# EAGLE board nar12b.v0.2 (EAGLE 6.1)
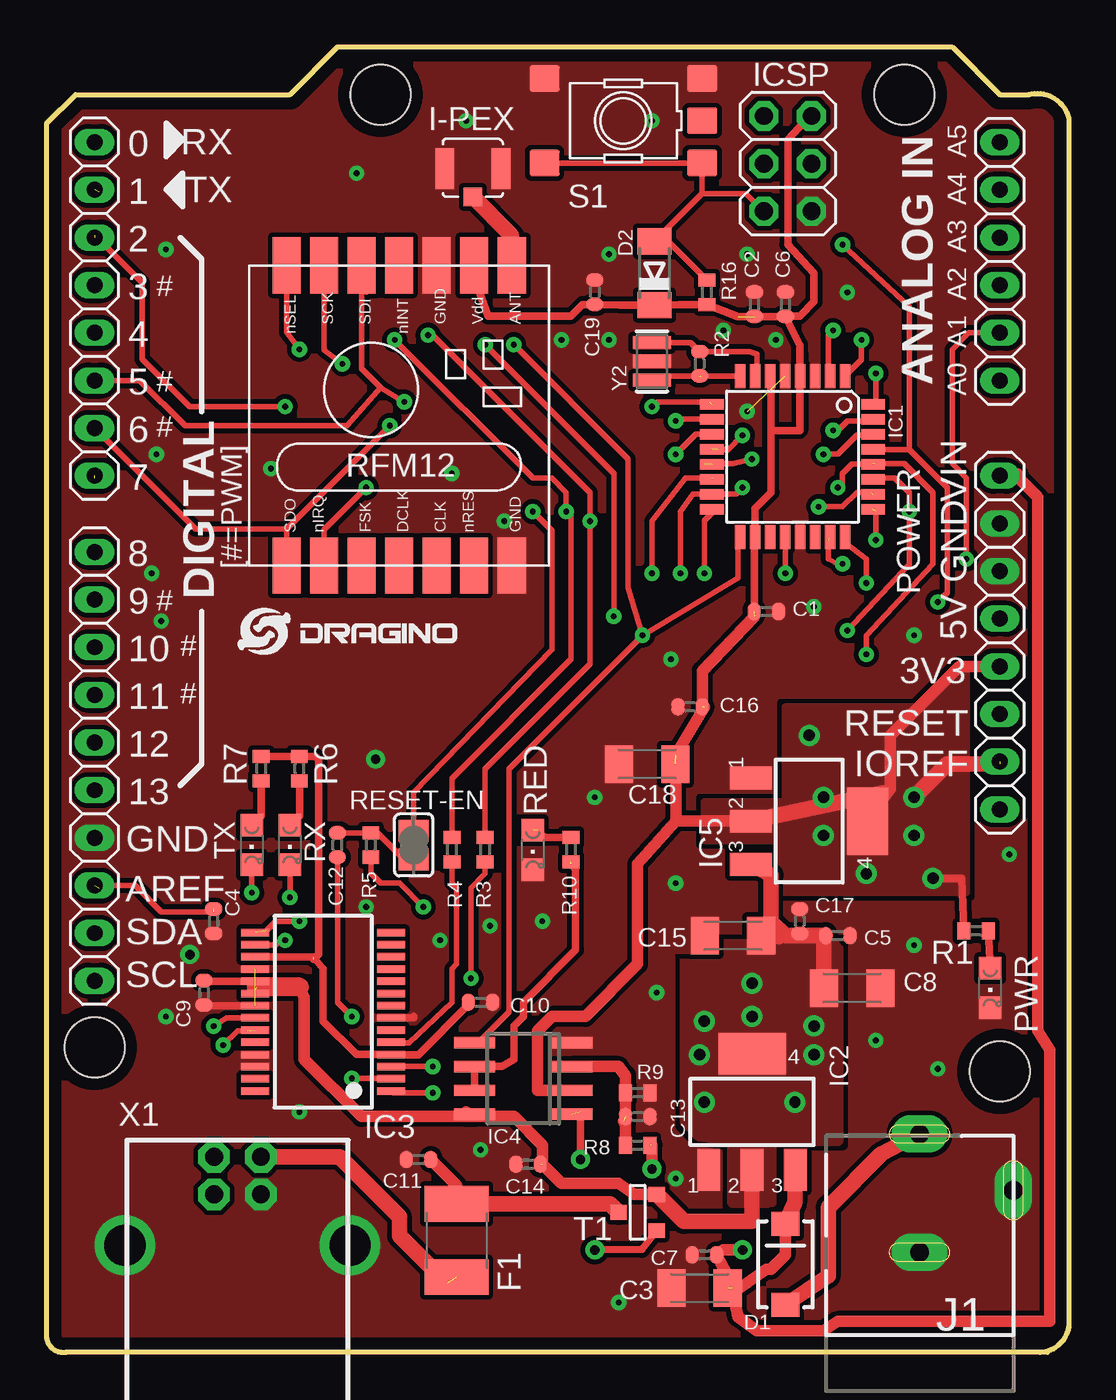
[diagram p0: board, top side]
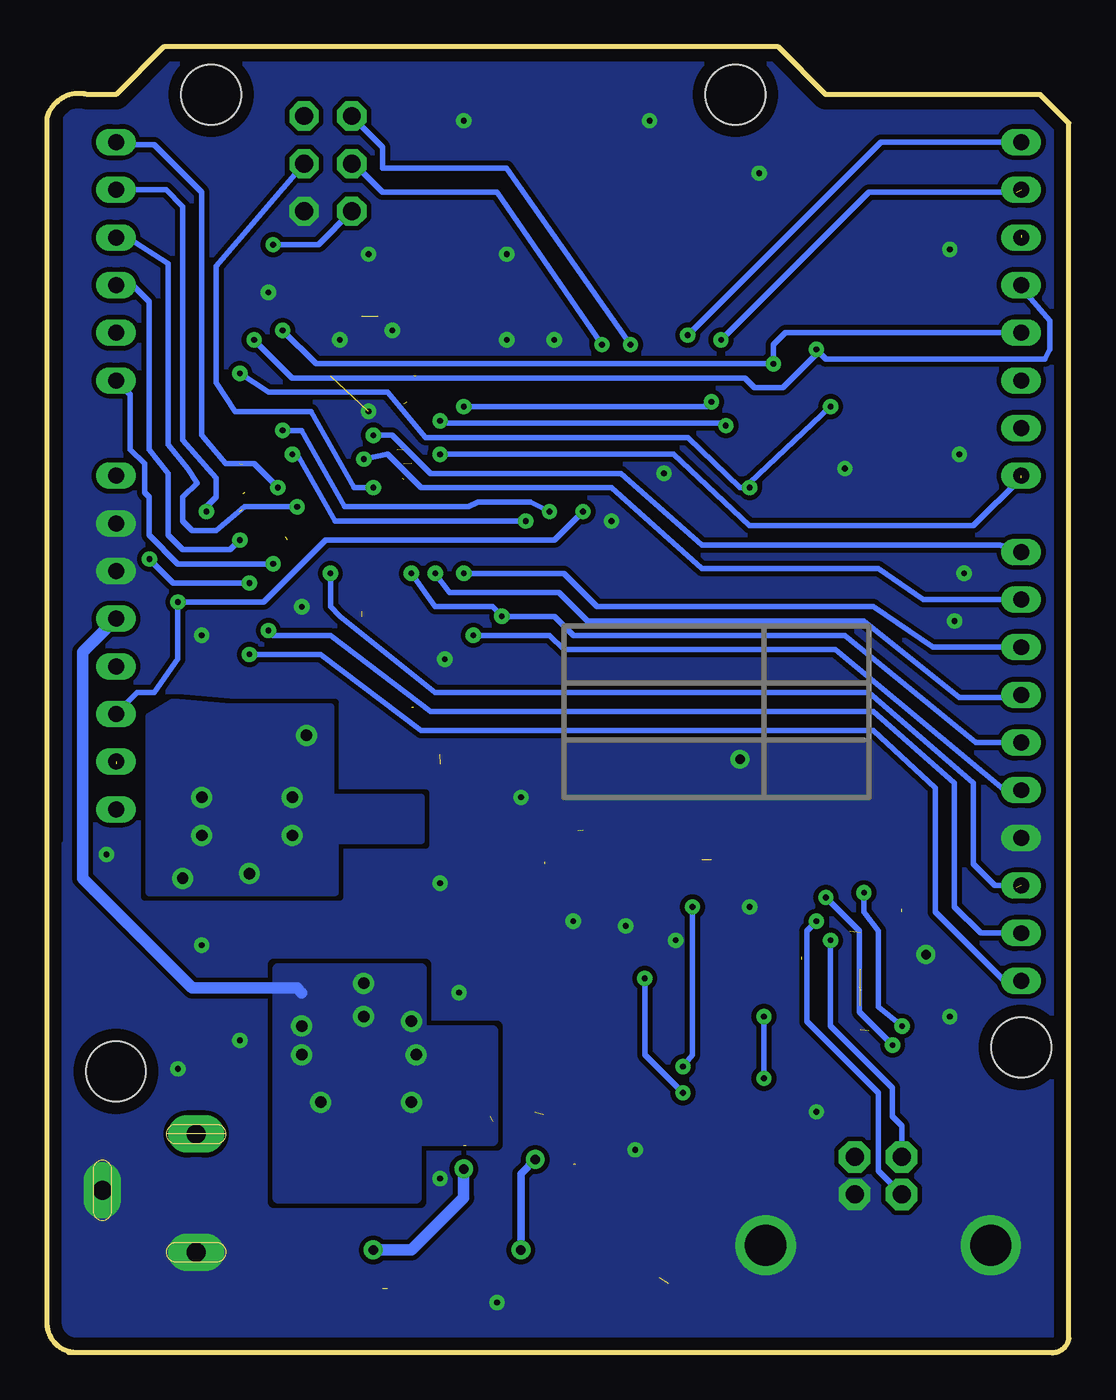
[diagram p1: board, bottom side, seen from below]

Size 54.48 x 69.6 mm. Coordinates in mm from the lower left corner, seen from the top.
Outline: 52.96,0.01 arc90 54.48,1.66 54.48,65.81 arc90 52.34,67.06 50.8,67.06 48.26,69.6 15.49,69.6 12.95,67.06 1.52,67.06 0,65.54 0,0.75 arc90 1,0.01
Outline: 53.34,0.01 52.96,0.01
Outline: 52.96,0.01 1.02,0.01
Copper layers (1*16): Top 0.035mm / dielectric 1.5mm / Bottom 0.035mm
Design rules: minimum track width 5mil, minimum drill 10mil, track to track 8mil, track to pad 8mil, pad to pad 8mil, via to via 10mil, smd to smd 8mil, copper to edge 26mil, drill to drill 10mil, minimum pad ring 10mil, minimum via ring 10mil, stop-mask expansion 1mil, vias tented up to drill 30mil, thermal gap 10mil
Net classes: 0 default: width 0.254 mm, clearance 0.254 mm; 1 power: width 0.61 mm, drill 0.406 mm, clearance 0.254 mm; 2 gnd: width 0.305 mm, drill 0.305 mm, clearance 0.254 mm; 3 usbvcc: width 0.508 mm, drill 0.61 mm, clearance 0.254 mm; 4 aref: width 0.406 mm, drill 0.61 mm, clearance 0.254 mm
Holes 3.2 mm at 17.78,67.06 45.72,67.06 2.54,16.26 50.8,14.99
vRestrict: area 3.9,23.9 to 9,25.7; area 4.2,26.4 to 7.9,28.1; area 4.6,29.5 to 8,30.6; area 4.6,32 to 8,33.2; area 4.6,34.6 to 8,35.7; area 4.6,37.1 to 8,38.2; area 4.6,39.8 to 6.1,40.9; area 6.5,41.3 to 8.3,48.6; area 6.6,61.3 to 9.1,62.7; area 6.6,63.9 to 9.1,65.3; area 4.4,45.9 to 5.8,47.1; area 4.4,48.6 to 6,49.8; 5 more areas

## Footprints (pad centres in the part's own frame; a part is rotated, then mirrored left to right if it is on the bottom)
1X06 = drill 0.85 pad 1.422 long: 1 -6.35,0; 2 -3.81,0; 3 -1.27,0; 4 1.27,0; 5 3.81,0; 6 6.35,0
C0402 = smd 0.7 x 0.9: 1 -0.65,0; 2 0.65,0
C1206K = smd 1.5 x 2: 1 -1.5,0; 2 1.5,0
SMA-DIODE = smd 1.27 x 1.47: A -2.15,0; C 2.15,0
MINIMELF = smd 1.4 x 1.8: A 1.7,0; C -1.7,0
L1812 = smd 1.9 x 3.4: 1 -1.95,0; 2 1.95,0
I-PEX = smd 1 x 2.2: GND -1.65,-0.27; GND1 1.35,-0.27 | smd 1 x 1: SIG -0.15,-1.77
SMARTPRJ_TQFP32-08 = smd 1.27 x 0.559: 1 -4.293,2.8; 2 -4.293,2; 3 -4.293,1.2; 4 -4.293,0.4; 5 -4.293,-0.4; 6 -4.293,-1.2; 7 -4.293,-2; 8 -4.293,-2.8; 17 4.293,-2.8; 18 4.293,-2; 19 4.293,-1.2; 20 4.293,-0.4; 21 4.293,0.4; 22 4.293,1.2; 23 4.293,2; 24 4.293,2.8 | smd 0.559 x 1.27: 9 -2.8,-4.293; 10 -2,-4.293; 11 -1.2,-4.293; 12 -0.4,-4.293; 13 0.4,-4.293; 14 1.2,-4.293; 15 2,-4.293; 16 2.8,-4.293; 25 2.8,4.293; 26 2,4.293; 27 1.2,4.293; 28 0.4,4.293; 29 -0.4,4.293; 30 -1.2,4.293; 31 -2,4.293; 32 -2.8,4.293
SOT223 = smd 1.219 x 2.235: 1 -2.311,-3.099; 2 0,-3.099; 3 2.311,-3.099 | smd 3.6 x 2.2: 4 0,3.099
SSOP28 = smd 0.4 x 1.5: 1 -4.225,-3.625; 2 -3.575,-3.625; 3 -2.925,-3.625; 4 -2.275,-3.625; 5 -1.625,-3.625; 6 -0.975,-3.625; 7 -0.325,-3.625; 8 0.325,-3.625; 9 0.975,-3.625; 10 1.625,-3.625; 11 2.275,-3.625; 12 2.925,-3.625; 13 3.575,-3.625; 14 4.225,-3.625; 15 4.225,3.625; 16 3.575,3.625; 17 2.925,3.625; 18 2.275,3.625; 19 1.625,3.625; 20 0.975,3.625; 21 0.325,3.625; 22 -0.325,3.625; 23 -0.975,3.625; 24 -1.625,3.625; 25 -2.275,3.625; 26 -2.925,3.625; 27 -3.575,3.625; 28 -4.225,3.625
SO08 = smd 0.6 x 2.2: 1 -1.905,-2.6; 2 -0.635,-2.6; 3 0.635,-2.6; 4 1.905,-2.6; 5 1.905,2.6; 6 0.635,2.6; 7 -0.635,2.6; 8 -1.905,2.6
2X03 = drill 0.95 pad 1.55 octagon: 1 -2.54,-1.27; 2 -2.54,1.27; 3 0,-1.27; 4 0,1.27; 5 2.54,-1.27; 6 2.54,1.27
1X10@1 = drill 0.85 pad 1.422 long: 1 -11.43,0; 2 -8.89,0; 3 -6.35,0; 4 -3.81,0; 5 -1.27,0; 6 1.27,0; 7 3.81,0; 8 6.35,0; 9 8.89,0; 10 11.43,0
1X08 = drill 0.85 pad 1.422 long: 1 -8.89,0; 2 -6.35,0; 3 -3.81,0; 4 -1.27,0; 5 1.27,0; 6 3.81,0; 7 6.35,0; 8 8.89,0
POWER_JACK_SLOT = drill 1 pad 2 long: GND@1 2.58,7.5; GND@2 7.58,10.8; PWR 2.58,13.8
CHIPLED_0805 = smd 1.2 x 1.2: A 0,-1.05; C 0,1.05
R0402 = smd 0.7 x 0.9: 1 -0.65,0; 2 0.65,0
SJ = smd 1.168 x 1.6: 1 -0.762,0; 2 0.762,0
TS42 = smd 1.6 x 1.4: 1 -4.2,2.25; 2 4.2,2.25; 3 -4.2,-2.25; 4 4.2,-2.25; 5 -4.2,0
SOT-23 = smd 0.787 x 0.889: 1 0.025,-1.016; 2 -0.94,1.016; 3 0.991,1.016
RFM12 = smd 1.5 x 3: 1 -5,-10; 2 -3,-10; 3 -1,-10; 4 1,-10; 5 3,-10; 6 5,-10; 7 7,-10; 8 7,6; 9 5,6; 10 3,6; 11 1,6; 12 -1,6; 13 -3,6; 14 -5,6
PN61729 = drill 0.95 pad 1.676 octagon: 1 1.25,4.71; 2 -1.25,4.71; 3 -1.25,2.71; 4 1.25,2.71 | drill 2.2: P$1 -6,0; P$2 6,0
RESONATOR = smd 0.7 x 2: 1 -1,0; 2 0,0; 3 1,0

## Placement (x,y rotation side)
AD  6x1F-H8.5  [1X06]  50.8,58.17 90 top
C1  100n  [C0402]  38.35,39.51 0 top
C2  100n  [C0402]  37.72,55.89 90 top
C3  10uF  [C1206K]  34.8,3.44 180 top
C4  100n  [C0402]  8.89,23 90 top
C5  100n  [C0402]  42.16,22.23 0 top
C6  100n  [C0402]  39.37,55.89 90 top
C7  100n-NL  [C0402]  35.05,5.22 180 top
C8  10uF  [C1206K]  42.93,19.44 0 top
C9  100n  [C0402]  8.38,19.19 270 top
C10  100n  [C0402]  23.11,18.68 180 top
C11  100n  [C0402]  19.81,10.3 180 top
C12  100n  [C0402]  15.49,27.06 270 top
C13  100n  [C0402]  31.5,12.58 0 top
C14  100n  [C0402]  25.65,10.04 180 top
C15  10uF  [C1206K]  36.58,22.23 180 top
C16  100n  [C0402]  34.29,34.43 180 top
C17  100n-NL  [C0402]  40.13,23 90 top
C18  10uF  [C1206K]  32,31.38 180 top
C19  100n  [C0402]  29.21,56.52 270 top
D1  SS14  [SMA-DIODE]  39.37,4.71 90 top
D2  CD1206-S01575  [MINIMELF]  32.39,57.54 90 top
F1  500ma  [L1812]  21.84,5.98 270 top
I-PEX  I-PEX  [I-PEX]  22.86,63.38 0 top
IC1  ATMEGA168-20AU  [SMARTPRJ_TQFP32-08]  39.75,47.76 270 top
IC2  BL1117-50CX  [SOT223]  37.59,12.84 0 top
IC3  FT232RL  [SSOP28]  14.73,18.17 90 top
IC4  LMV358D  [SO08]  25.4,14.61 90 top
IC5  BL1117-33CX  [SOT223]  40.64,28.33 270 top
ICSP  3x2 M  [2X03]  39.5,63.38 270 top
IOH  10x1F-H8.5  [1X10@1]  2.54,31.25 270 top
IOL  8x1F-H8.5  [1X08]  2.54,55.63 270 top
J1  12V_VIN  [POWER_JACK_SLOT]  43.94,-2.15 0 top
POWER  8x1F-H8.5  [1X08]  50.8,37.85 90 top
PWR  [CHIPLED_0805]  50.29,19.44 180 top
R1  10K  [R0402]  49.53,22.49 180 top
R2  1M  [R0402]  34.8,52.71 270 top
R3  1K  [R0402]  23.37,26.81 270 top
R4  1K  [R0402]  21.59,26.81 270 top
R5  100_NL  [R0402]  17.27,27.06 270 top
R6  1K  [R0402]  13.46,31.12 270 top
R7  1K  [R0402]  11.43,31.12 270 top
R8  10K  [R0402]  31.5,11.06 0 top
R9  10K  [R0402]  31.5,13.85 180 top
R10  1K  [R0402]  27.94,26.81 270 top
R16  10K  [R0402]  35.18,56.52 270 top
RED  [CHIPLED_0805]  25.91,26.81 180 top
RESET-EN  [SJ]  19.56,27.06 90 top
RX  [CHIPLED_0805]  12.95,27.06 180 top
S1  [TS42]  30.73,65.67 180 top
T1  FDN340P  [SOT-23]  31.5,7.5 270 top
TX  [CHIPLED_0805]  10.92,27.06 180 top
U$1  LOGO-NEW  [LOGO-SILK-NEW]  10.16,37.22 0 top
U$2  RFM12_SMDSMD  [RFM12]  17.78,51.95 0 top
X1  [PN61729]  10.16,5.72 0 top
Y2  CSTCE16M0V53-R0 16MHZ  [RESONATOR]  32.26,52.84 90 top

## Library data of the parts
AD C1 C2 C4-C7 C9-C14 C16 C17 C19 ICSP IOH IOL POWER R2 Y2 = SmartPrj
C3 C18 = resistor; VOL: 25V
C8 = resistor
C15 = resistor; VOL: 10V
D1 = SparkFun
D2 = diode
F1 I-PEX IC1 IC2 IC5 J1 PWR R1 R3-R10 R16 RED RESET-EN RX S1 TX U$1 U$2 X1 = dragino
IC3 = ftdichip; MPN: FT232RL; OC_FARNELL: 1146032; OC_NEWARK: 91K9918
IC4 = linear
T1 = zetex

## Nets
3.3V: C1.1 C2.1 C6.1 C16.1 C18.1 C19.2 D2.C IC1.4 IC1.6 IC1.18 IC4.2 IC5.2 IC5.4 ICSP.2 POWER.2 POWER.4 R1.2 R16.2 U$2.9
3.3V1: C10.2 IC3.4 IC3.17 R6.1 R7.1
5-GND: S1.5
5V [power]: C5.1 C8.1 C9.1 C14.1 C15.1 C17.1 IC2.2 IC2.4 IC3.19 IC3.20 IC4.8 IC5.3 POWER.5 T1.2
/RST: C12.1 D2.A IC1.29 ICSP.5 POWER.3 R5.1 R16.1 RESET-EN.1 RESET-EN.2 S1.1 S1.2
/SEL: IC1.1 IOL.4 U$2.14
AD0: AD.1 IC1.23
AD1: AD.2 IC1.24
AD2: AD.3 IC1.25
AD3: AD.4 IC1.26
AD4/SDA: AD.5 IC1.27 IOH.9
AD5/SCL: AD.6 IC1.28 IOH.10
AREF: C4.2 IC1.20 IOH.8
AVR_RXD: IC3.1 R3.2
AVR_TXD: IC3.5 R4.2
CMP: C13.1 IC4.3 R8.1 R9.2
GND [gnd]: C1.2 C2.2 C3.2 C4.1 C5.2 C6.2 C7.2 C8.2 C9.2 C10.1 C11.2 C13.2 C14.2 C15.2 C16.2 C17.2 C18.2 C19.1 I-PEX.GND I-PEX.GND1 IC1.3 IC1.5 IC1.21 IC2.1 IC3.7 IC3.18 IC3.21 IC3.25 IC3.26 IC4.4 IC5.1 ICSP.6 IOH.7 J1.GND@1 J1.GND@2 POWER.6 POWER.7 PWR.C R9.1 RED.C S1.3 S1.4 U$2.7 U$2.10 X1.4 X1.P$1 X1.P$2 Y2.2
MISO: IC1.16 ICSP.1 IOH.5
MOSI: IC1.15 ICSP.4 IOH.4
N$2: D1.A J1.PWR
N$3: PWR.A R1.1
N$4: IC3.16 X1.2
N$5: IC3.15 X1.3
N$6: F1.2 X1.1
N$7: IC3.3 R5.2
N$8: IC3.23 RX.C
N$9: C12.2 IC3.2
N$10: IC3.22 TX.C
N$11: R6.2 RX.A
N$12: R7.2 TX.A
N$13: IC4.1 T1.3
N$15: IC4.6 IC4.7 R10.2
N$16: R10.1 RED.A
N$19: I-PEX.SIG U$2.8
PB0: IC1.12 IOH.1
PB1: IC1.13 IOH.2
PD0: IC1.30 IOL.1 R3.1
PD1: IC1.31 IOL.2 R4.1
PD7: IC1.11 IOL.8
RF_/IRQ: IC1.32 IOL.3 U$2.2
RF_SCK: IC1.2 IOL.5 U$2.13
RF_SDI: IC1.9 IOL.6 U$2.12
RF_SDO: IC1.10 IOL.7 U$2.1
SCK: IC1.17 IC4.5 ICSP.3 IOH.6
SS: IC1.14 IOH.3
USBVCC: C11.1 F1.1 T1.1
VIN [power]: C3.1 C7.1 D1.C IC2.3 POWER.8 R8.2
XTAL1: IC1.7 R2.1 Y2.3
XTAL2: IC1.8 R2.2 Y2.1

## Tracks (layer width: path | path; a pad name or v marks a point on that pad's centre or on a via)
3.3V  (via drill 0.61)  (5 unrouted)
  Top 0.305: 28.19,13.98 28.13,14.11 IC4.2 | U$2.9 22.78,57.87 22.86,57.79 22.61,57.79
  Top 0.406: 22.61,57.79 23.51,55.25 27.94,55.25 28.56,55.87 C19.2 30.51,55.84 D2.C 33.69,55.87 R16.2 36.83,55.24 C6.1 | 37.72,39.25 37.72,43.31 IC1.18 37.75,45 38.61,45.86 38.61,49.16 | 38.61,49.16 38.61,52 IC1.6 38.61,52.11 | IC1.4 40.15,53.2 40.13,53.22 | 40.13,53.22 40.13,53.71 C6.1 | ICSP.2 40.64,65.92 39.5,64.65 39.5,59.06 40.89,57.54 40.89,56.02 40.13,55.25 39.39,55.25 C6.1 | 40.13,53.22 40.13,49.16 38.61,49.16 | v47.24,25.28 48.77,25.28 R1.2
  Top 0.61: IC5.2 33.53,28.33 | 33.53,28.33 31.5,26.04 31.5,20.71 28.7,17.92 26.92,17.92 26.16,17.15 26.16,13.98 28.19,13.98 | 33.53,28.33 33.53,31.89 35.05,34.43 | C16.1 34.94,36.35 37.72,39.25 | POWER.4 48.64,36.58 44.96,32.9 44.96,30.06 IC5.4
  Top 0.813: IC5.2 44.7,29.85 | v46.23,29.6 48.01,31.38 50.8,31.38
  other vias: 40.64,32.9 41.4,29.6 46.23,27.57 43.69,25.54 41.4,27.57
  pour Bottom: 39.37,34.43 39.37,29.6 34.54,29.6 34.54,27.31 39.12,27.31 39.12,24.52 49.02,24.52 49.02,33.92 47.75,34.68 44.7,34.43
  pour Top (no thermals): 35.05,29.35 39.37,29.35 39.37,34.43 46.74,34.43 46.74,34.68 48.26,36.2 49.02,36.2 49.02,24.52 39.12,24.52 39.12,27.31 35.05,27.31
3.3V1  (1 unrouted)
  Top 0.406: C10.2 22.46,18.54 19.81,15.88 18.54,15.88 18.54,15.89 IC3.4 16.5,15.89 14.73,17.66 14.73,20.46 14.22,21.09 11.24,21.09 IC3.17 | R7.1 R6.1 14.34,31.77 14.48,31.63 14.48,21.22 14.22,20.96
5V  (via drill 0.61)  (2 unrouted)
  Top 0.305: C9.1 8.42,19.79 8.89,19.79
  Top 0.406: 8.48,19.79 8.89,19.79 IC3.19 IC3.20 11.11,19.31 | 8.48,19.79 8.38,19.69 8.38,19.79 8.48,19.79 | C17.1 40.13,22.23 | 38.61,23 38.61,22.49 39.12,21.98 38.33,21.98 C15.1
  Top 0.61: 41.43,22.21 41.4,22.23 | T1.2 31.32,8.44 30.48,9.03 27.43,9.03 26.42,10.04 26.42,11.06 24.89,12.58 22.8,12.58 IC4.8 | IC4.8 22.67,12.58 22.35,12.58 | 22.35,12.58 16.76,12.58 13.72,15.63 13.72,18.93 13.46,19.49 | IC4.8 22.35,12.71 | 22.35,12.71 22.35,12.84 | 22.35,12.71 22.35,12.58
  Top 0.813: IC2.2 37.59,6.99 33.96,6.99 T1.2 | C8.1 41.43,22.21 | C5.1 40.13,22.23 39.37,22.23 38.61,23 38.61,25.46 IC5.3
  Top 1.016: 13.46,19.49 11.18,19.49
  Bottom 0.61: 40.89,19.19 41.15,19.44 46.74,19.44 52.58,25.28 52.58,37.35 POWER.5
  other vias: 35.05,17.66 34.8,15.88 35.05,13.34 39.88,13.34 37.59,19.69 40.89,15.88 40.89,17.41 37.59,17.92
  pour Bottom: 30.73,17.15 30.73,11.31 34.8,11.31 34.8,8.26 42.16,8.26 42.16,20.46 34.54,20.46 34.54,17.15
  pour Top (no thermals): 42.16,21.73 34.04,21.73 34.04,12.33 34.8,11.57 36.58,11.31 36.58,8.01 38.61,8.01 38.61,11.31 42.16,11.31
/RST  (via drill 0.3 pad 0.41, 0.3 pad 0.61)  (1 unrouted)
  Top 0.305: C12.1 R5.1 17.64,27.71 19.05,26.3 | RESET-EN.1 RESET-EN.2 19.56,29.85 26.92,37.47 26.92,43.82 v25.91,44.84 | IC1.29 44.06,48.14 45.97,48.14 | v47.5,40.01 48.01,40.52 48.01,46.11 45.97,48.14 | R16.1 33.11,59.24 D2.A 34.93,61.79 | 34.93,61.79 S1.1 S1.2 | ICSP.5 37.28,61.79 34.93,61.79 | 45.97,48.14 45.97,55.76 v42.42,59.06
  Bottom 0.305: v25.91,44.84 27.43,43.32 39.62,43.32 42.93,40.01 v47.5,40.01 47.5,36.97 48.77,35.19 49.66,35.19 POWER.3 | v42.42,59.06 40,59.06 ICSP.5
/SEL  (via drill 0.3 pad 0.61)
  Top 0.305: U$2.14 12.78,54.41 v13.46,53.48 | v43.43,53.98 43.43,52.94 IC1.1
  Bottom 0.305: v43.43,53.98 41.4,51.95 17.27,51.95 16.76,51.44 15.24,51.44 13.46,53.22 v13.46,53.48 12.95,52.97 1.27,52.97 1.02,53.48 1.02,55 2.54,56.78 IOL.4
AD0  (via drill 0.3 pad 0.41)  (1 unrouted)
  Top 0.305: v42.42,42.05 42.16,42.05 41.66,42.3 41.66,43.32
  Bottom 0.305: AD.1 50.04,51.06 50.04,48.14 49.28,47.38 49.28,45.86 49.02,45.6 49.02,43.57 47.5,42.05 v42.42,42.05
AD1  (via drill 0.3 pad 0.41)
  Top 0.305: AD.2 49.15,54.36 48.26,53.48 48.26,47.38 49.02,46.62 v49.02,42.3 | v43.69,41.03 43.69,42.3 42.55,43.18 IC1.24
  Bottom 0.305: v49.02,42.3 47.75,41.03 v43.69,41.03
AD2  (via drill 0.3 pad 0.41)  (1 unrouted)
  Top 0.305: v44.2,43.32 44.2,44.84
  Bottom 0.305: AD.3 49.91,56.9 49.02,56.02 49.02,48.14 48.01,46.87 48.01,43.57 47.24,42.81 44.7,42.81 v44.2,43.32
AD3  (via drill 0.3 pad 0.41)  (1 unrouted)
  Top 0.305: v41.15,45.09 42.42,45.09 43.18,45.86 43.94,45.86
  Bottom 0.305: AD.4 50.17,59.44 48.01,58.05 48.01,48.4 46.99,47.13 46.48,46.36 47.24,45.6 47.24,44.33 46.74,43.82 45.47,43.82 43.94,45.09 v41.15,45.09
AD4/SDA  (via drill 0.3 pad 0.41, 0.3 pad 0.61)
  Top 0.305: v42.67,38.49 45.97,42.05 v45.97,44.84 45.97,45.86 45.21,46.62 44.1,46.62 IC1.27
  Bottom 0.305: v42.67,38.49 42.42,38.24 39.37,38.24 34.04,34.17 10.41,34.17 6.1,30.36 6.1,23.76 4.7,22.36 IOH.9 | AD.5 48.13,61.98 47.24,61.1 47.24,48.65 45.47,46.62 45.47,45.6 45.97,45.09 v45.97,44.84
AD5/SCL  (via drill 0.3 pad 0.3, 0.3 pad 0.41)  (1 unrouted)
  Top 0.305: v43.69,37.22 43.69,38.24 47.24,42.05 47.24,45.86 45.72,47.38 44.2,47.38 | IC1.28 42.91,47.36 42.42,46.87 42.42,46.36 v42.16,46.11
  Bottom 0.305: IOH.10 3.43,19.82 7.11,23.5 7.11,30.11 10.41,33.16 34.54,33.16 39.88,37.22 v43.69,37.22 | v42.16,46.11 43.43,47.38 44.96,47.38 46.23,48.9 46.23,61.86 48.77,64.4 50.67,64.4 AD.6
AREF  (via drill 0.3 pad 0.61)  (2 unrouted)
  Top 0.305: v39.37,41.54 39.37,43.45 IC1.20 | 2.79,24.77 2.92,24.9 4.7,24.9 6.1,23.5 8.89,23.5
  Bottom 0.305: v39.37,41.54 39.37,39.76 38.86,39.25 33.78,35.19 10.67,35.19 5.08,30.36 5.08,26.04 3.94,24.9 IOH.8
AVR_RXD  (via drill 0.3 pad 0.41)
  Top 0.305: R3.2 23.37,25.54 22.61,24.77 v22.61,19.95 | v20.57,13.85 18.45,13.85 IC3.1
  Bottom 0.305: v22.61,19.95 22.61,15.88 v20.57,13.85
AVR_TXD
  Top 0.305: R4.2 21.59,25.03 21.84,24.77 21.84,20.71 21.59,20.46 21.59,18.68 19.3,16.52 18.8,16.52 18.54,16.54
  Top 0.406: IC3.5 18.54,16.54
CMP  (1 unrouted)
  Top 0.61: R8.1 30.85,12.22 30.73,12.33 | C13.1 R9.2 30.85,14.76 30.48,15.25 IC4.3
GND  (via drill 0.3 pad 0.41, 0.5 pad 0.41)  (2 unrouted)
  Top 0.406: IC3.21 8.42,18.49 C9.2 | IC3.7 19.56,17.84 19.56,17.92
  other vias: 51.31,26.55 7.62,21.22 47.5,15.12 44.2,16.65 46.23,21.73 32.51,19.19 33.53,25.03 30.48,2.68 23.11,10.8 13.46,12.84 6.35,17.92 17.02,23.76 29.21,29.6 26.42,23 23.62,22.74 46.23,38.24 40.89,39.76 37.34,50.17 38.86,53.98 36.07,54.49 27.43,53.98 29.97,53.98 29.97,58.56 21.59,46.87 11.94,47.13 5.84,47.89 42.67,56.52 32.26,65.67 22.35,65.67 16.51,62.87 6.35,58.81 5.59,41.54 6.1,39 24.38,44.33 33.27,36.97 17.53,31.63 37.34,58.56 20.95,21.98 33.53,9.28
  pour Top (isolate 0.254, rank 2, no thermals): 0,64.4 0,65.54 1.52,67.06 12.57,67.06 12.83,67.19 12.95,66.94 15.62,69.6 48.26,69.6 48.51,69.35 48.51,69.22 50.42,67.32 52.45,67.32 53.59,66.18 53.59,26.04 54.23,0.9 -0.13,0.52
  pour Bottom (rank 2, no thermals): -0.64,65.16 1.4,67.19 12.95,67.19 15.49,69.73 48.51,69.73 51.18,67.06 52.96,67.06 53.47,66.56 53.47,27.19 54.23,26.42 53.97,0.64 -0.51,0.9 -0.64,0.77
MISO  (via drill 0.3 pad 0.41, 0.3 pad 0.61)
  Top 0.305: v35.05,41.54 35.05,44.35 35.56,44.86 IC1.16 | v23.37,53.73 30.23,46.87 v30.23,39.25
  Bottom 0.305: v35.05,41.54 33.78,39.76 30.73,39.76 v30.23,39.25 27.43,39.25 26.42,38.24 11.94,38.24 4.95,32.52 IOH.5 | ICSP.1 36.58,64.27 36.58,63.13 29.97,63.13 v23.37,53.73
MOSI  (via drill 0.3 pad 0.3, 0.3 pad 0.41)
  Top 0.305: v33.78,41.54 33.78,44.84 34.45,45.76 IC1.15 36.73,45.76 v37.08,46.11
  Bottom 0.305: v33.78,41.54 33.02,40.52 27.18,40.52 25.65,39 10.92,39 5.84,34.93 2.67,34.93 IOH.4 | v37.08,46.11 38.1,46.11 40.39,50.17 44.45,50.17 45.47,51.7 45.47,57.92 ICSP.4
N$2
  Top 0.813: J1.PWR 44.49,10.59 41.66,7.76 41.66,4.08 D1.A
N$3
  Top 0.406: R1.1 50.29,20.46 PWR.A
N$4  (via drill 0.3 pad 0.41)
  Top 0.305: v12.7,21.98 12.45,21.98 12.19,21.73 11.13,21.73 IC3.16
  Bottom 0.305: X1.2 8.91,12.09 9.4,12.58 9.4,14.11 12.7,17.41 v12.7,21.98
N$5  (via drill 0.3 pad 0.41)  (1 unrouted)
  Top 0.305: v13.46,23 12.19,23 11.68,22.49
  Bottom 0.305: X1.3 10.16,9.68 10.16,13.85 13.97,17.66 13.97,22.49 v13.46,23
N$6  (1 unrouted)
  Top 0.813: X1.1 15.61,10.43 18.8,7.25 18.8,6.23 21.34,3.69
N$7  (via drill 0.3 pad 0.41)
  Top 0.305: R5.2 17.27,25.54 17.78,25.03 18.8,25.03 v20.07,23.76 | v20.57,15.25 18.48,15.25 IC3.3
  Bottom 0.305: v20.07,23.76 20.07,15.88 v20.57,15.25
N$8  (via drill 0.3 pad 0.41)  (1 unrouted)
  Top 0.305: RX.C v12.95,24.27 | v9.4,16.39 10.16,17.15 10.67,17.15
  Bottom 0.305: v12.95,24.27 11.18,22.49 11.18,18.17 v9.4,16.39
N$9  (via drill 0.3 pad 0.41)
  Top 0.305: C12.2 15.49,18.68 v16.26,17.92 | v16.26,14.61 18.34,14.61 IC3.2
  Bottom 0.305: v16.26,17.92 v16.26,14.61
N$10  (via drill 0.3 pad 0.41)
  Top 0.305: TX.C v10.92,24.52 | v8.89,17.41 9.58,17.84 IC3.22
  Bottom 0.305: v10.92,24.52 10.92,23.5 10.16,22.49 10.16,18.42 v8.89,17.41
N$11
  Top 0.406: R6.2 13.46,28.62 RX.A
N$12
  Top 0.406: R7.2 11.43,28.62 TX.A
N$13  (via drill 0.5 pad 0.61)  (1 unrouted)
  Top 0.406: T1.3 31.73,5.49 v29.21,5.47 | v28.45,10.3 28.45,12.84
  Bottom 0.406: v29.21,5.47 29.21,9.53 v28.45,10.3
N$15  (1 unrouted)
  Top 0.406: IC4.7 IC4.6 24.26,15.25 24.89,15.63 24.89,17.41 25.4,17.92 25.4,18.68 28.19,21.47 28.19,25.79 27.94,26.04
N$16  (1 unrouted)
  Top 0.406: R10.1 26.53,27.46 26.16,27.82
N$19
  Top 0.813: U$2.8 24.78,59.54 I-PEX.SIG
PB0  (via drill 0.3 pad 0.41)  (1 unrouted)
  Top 0.305: v37.08,48.9 36.32,48.14 35.81,48.14
  Bottom 0.305: IOH.1 3.68,43.06 19.56,43.06 23.88,46.87 34.04,46.87 36.07,48.9 v37.08,48.9
PB1  (via drill 0.3 pad 0.41)  (1 unrouted)
  Top 0.305: v37.59,47.63 36.58,47.38 35.05,47.38
  Bottom 0.305: IOH.2 7.75,40.14 10.16,41.79 19.56,41.79 24.38,46.11 34.54,46.11 36.32,47.89 v37.59,47.63
PD0  (via drill 0.3 pad 0.41, 0.3 pad 0.61)
  Top 0.305: R3.1 23.37,31.12 28.96,36.71 v28.96,44.33 28.96,45.86 20.57,54.24 v20.32,54.24 | v41.4,47.89 42.16,47.89 43.18,48.9 44.1,48.9 IC1.30
  Bottom 0.305: v28.96,44.33 39.12,44.33 41.15,47.89 v41.4,47.89 | v20.32,54.24 10.03,64.52 IOL.1
PD1  (via drill 0.3 pad 0.41, 0.3 pad 0.61)  (1 unrouted)
  Top 0.305: R4.1 21.59,30.62 27.94,36.97 27.94,44.59 v27.69,44.84 27.69,45.86 26.92,46.62 25.91,46.62 v18.54,53.98 | v41.91,49.16 42.16,49.16 42.67,49.67 44.14,49.67 IC1.31
  Bottom 0.305: v27.69,44.84 28.7,45.35 31.5,45.35 32,45.09 38.61,45.09 40.89,49.16 v41.91,49.16 | v18.54,53.98 10.67,61.86 2.79,61.86
PD7  (via drill 0.3 pad 0.41)  (1 unrouted)
  Top 0.305: IC1.11 34.6,48.96 v33.53,47.89
  Bottom 0.305: v33.53,47.89 21.08,47.89 17.02,44.08 5.08,44.08 2.54,46.62
RF_/IRQ  (via drill 0.3 pad 0.61)  (1 unrouted)
  Top 0.305: U$2.2 14.78,43.87 v17.02,46.11 | v44.2,52.21 44.2,50.71 IC1.32 | v12.7,50.43 7.62,50.43 5.08,52.97 5.08,57.03 2.54,59.57
  Bottom 0.305: v44.2,52.21 42.67,51.19 36.32,51.19 34.29,48.78 20.32,48.78 17.53,46.11 v17.02,46.11 17.02,46.36 v12.7,50.43
RF_SCK  (via drill 0.3 pad 0.61)
  Top 0.305: U$2.13 14.78,53.43 v15.75,52.71 | v41.91,54.49 41.66,54.24 41.66,52.21 | 41.66,52.21 | 41.66,52.21 IC1.2
  Bottom 0.305: v41.91,54.49 40.13,52.71 v15.75,52.71 15.75,53.73 15.11,54.36 IOL.5
RF_SDI  (via drill 0.3 pad 0.41)  (1 unrouted)
  Top 0.305: 17.78,51.44 16.78,52.44 U$2.12 17.03,56.54 17.02,56.52 | 17.78,51.44 v19.05,50.68 | 35.33,50.43 IC1.9 | IOL.6 4.95,51.82 7.37,49.41 16,49.41 17.78,51.44 | v32.26,50.43 32.51,50.68 35.31,50.68
  Bottom 0.305: v19.05,50.68 19.3,50.43 v32.26,50.43
RF_SDO  (via drill 0.3 pad 0.41)
  Top 0.305: U$2.1 12.78,43.9 | 12.78,43.9 v18.29,49.41 | v33.53,49.67 33.62,49.76 IC1.10 | 12.78,43.9 7.92,43.9 IOL.7
  Bottom 0.305: v18.29,49.41 18.54,49.54 33.27,49.54 v33.53,49.67
SCK  (via drill 0.3 pad 0.41, 0.3 pad 0.61)
  Top 0.305: IC4.5 22.99,16.52 24.64,18.17 24.64,31.12 v31.75,38.24 | 36.83,43.35 IC1.17 36.83,43.47 36.83,41.28 v31.75,38.24 | v31.75,38.24 30.99,40.78 30.99,47.63 v24.89,53.73
  Bottom 0.305: v31.75,38.24 27.69,38.24 26.92,37.47 12.45,37.47 3.43,29.98 IOH.6 | v24.89,53.73 30.48,61.86 36.58,61.86 38.1,63.38 ICSP.3
SS  (via drill 0.3 pad 0.41)  (1 unrouted)
  Top 0.305: v32.26,41.54 32.26,44.33 34.04,46.62 35.56,46.62
  Bottom 0.305: IOH.3 7.24,37.6 10.41,39.76 25.15,39.76 26.92,41.54 v32.26,41.54
USBVCC
  Top 0.61: F1.1 21.84,8.91 C11.1
  Top 0.813: F1.1 30.03,7.93 T1.1
VIN  (via drill 0.5 pad 0.61)  (2 unrouted)
  Top 0.406: C3.1 36.32,3.44 36.32,3.69 | 36.58,3.18 36.58,3.44
  Top 0.61: D1.C 39.37,5.22 38.61,4.45 38.35,4.45 36.58,3.18 36.83,1.91 37.85,1.15 41.4,1.15 42.16,1.66 53.47,1.66 53.47,16.14 52.83,17.15 52.83,45.6 51.69,46.74 | C3.1 36.46,3.78 C7.1 36.07,5.47 v37.08,5.47 | v32.26,9.79 32.26,11.06
  Top 0.813: IC2.3 39.88,8.01 D1.C | POWER.8 51.69,46.74
  Bottom 0.61: v37.08,5.47 35.05,5.47 32.26,8.26 v32.26,9.79
XTAL1
  Top 0.305: Y2.3 34.32,53.84 R2.1 37.45,53.36 37.85,53.22 37.85,52.21 IC1.7
XTAL2  (1 unrouted)
  Top 0.305: IC1.8 34.9,52.05 34.8,51.95 | R2.2 33.13,52.06 32.77,51.7 32.4,51.7 Y2.1

## Text on the board
tPlace: 0 | 1 | 2 | 3 | 4 | 5 | 6 | 7 | 8 | 9 | 10 | 11 | 12 | 13
tNames: RX | A5 | TX | A4 | A3 | # | A2 | A1 | # | ANALOG IN | A0 | # | VIN | [#=PWM] | GND | # | DIGITAL | # | 5V | 3V3 | # | RESET | IOREF | GND | AREF | SDA | SCL
tDocu: MODEL: nar12b v0.2
bDocu: 433MHZ | 868MHZ | 915MHZ
214bmp: D:/SmartProjects/Snc/a4_bn_logo2.bmp